# EAGLE board BluetoothMate-GiantPanel v16a (EAGLE 6.5.0), part 1 of 5
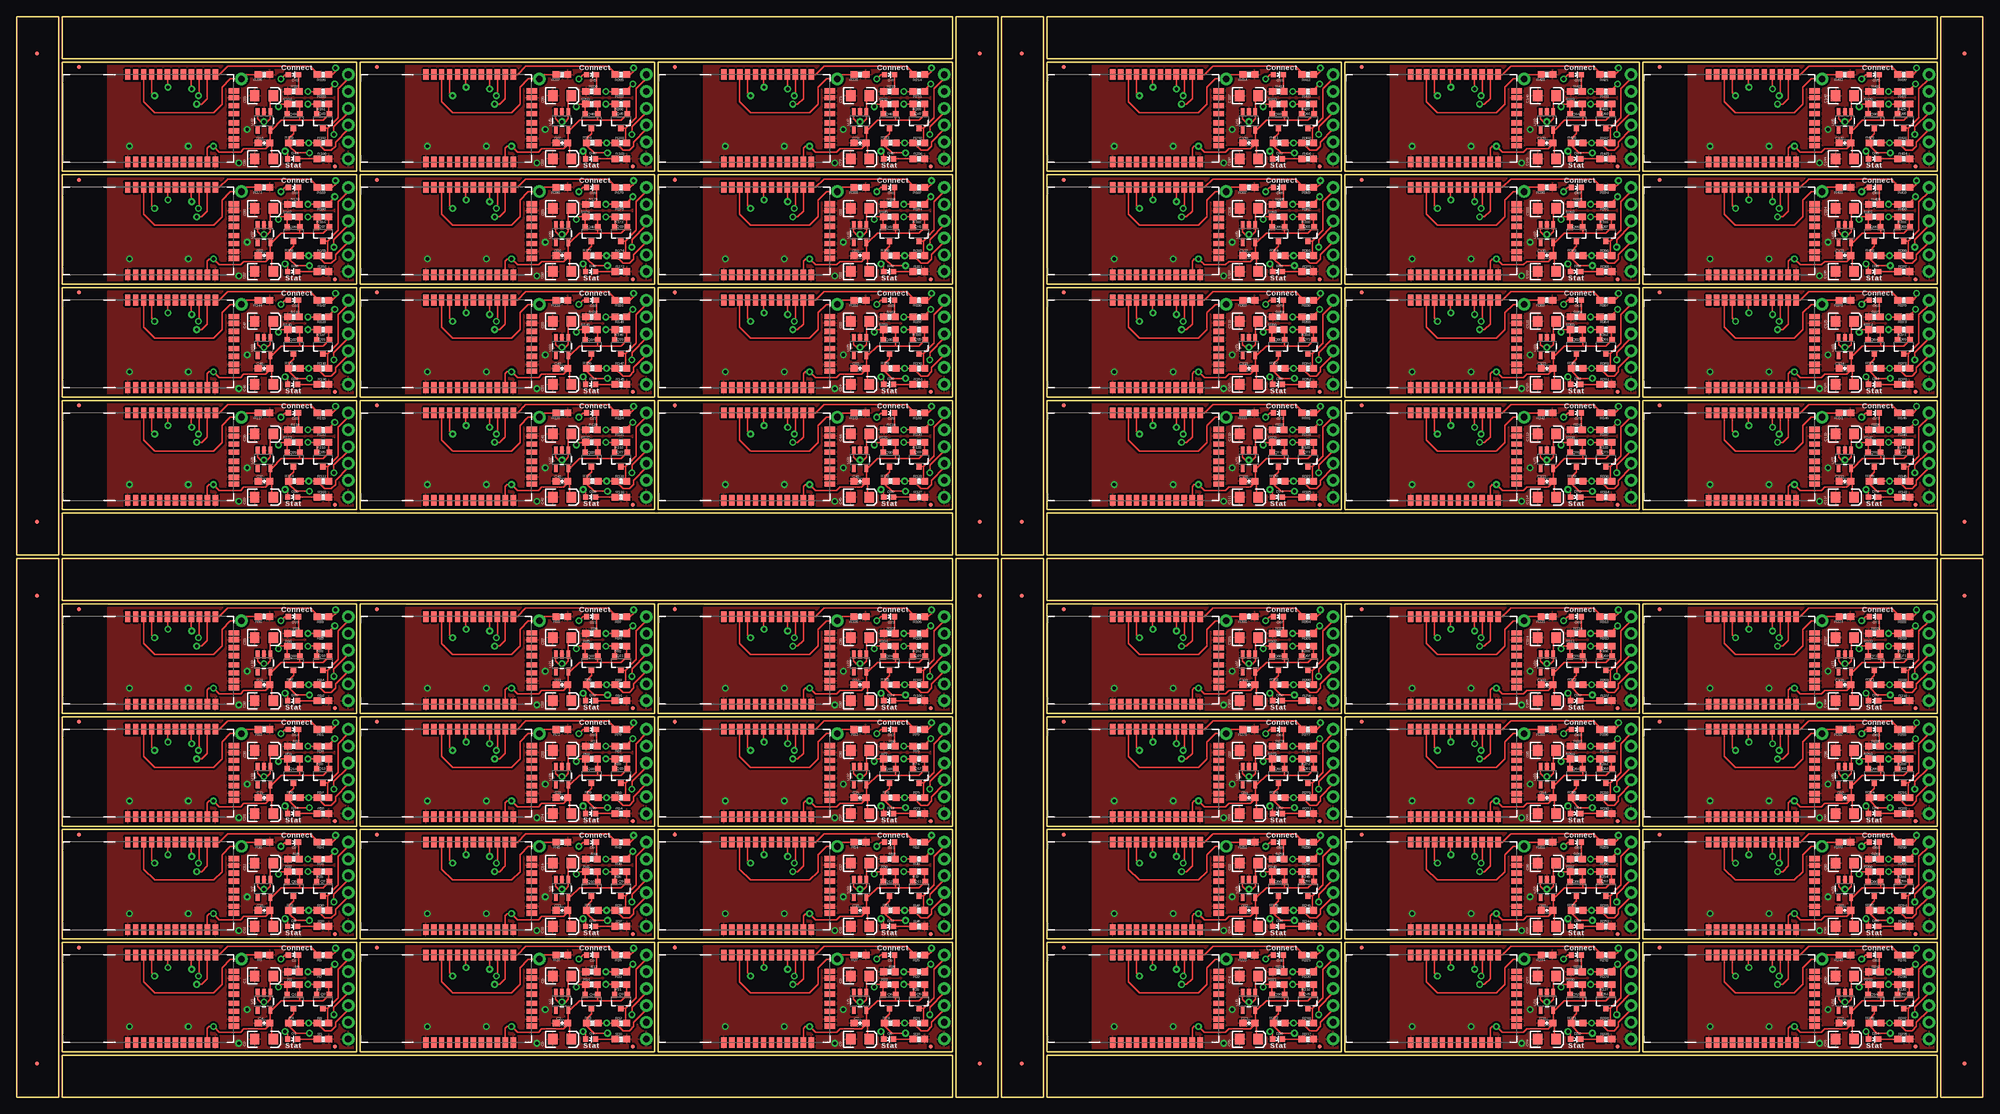
[diagram p0: board, top side]
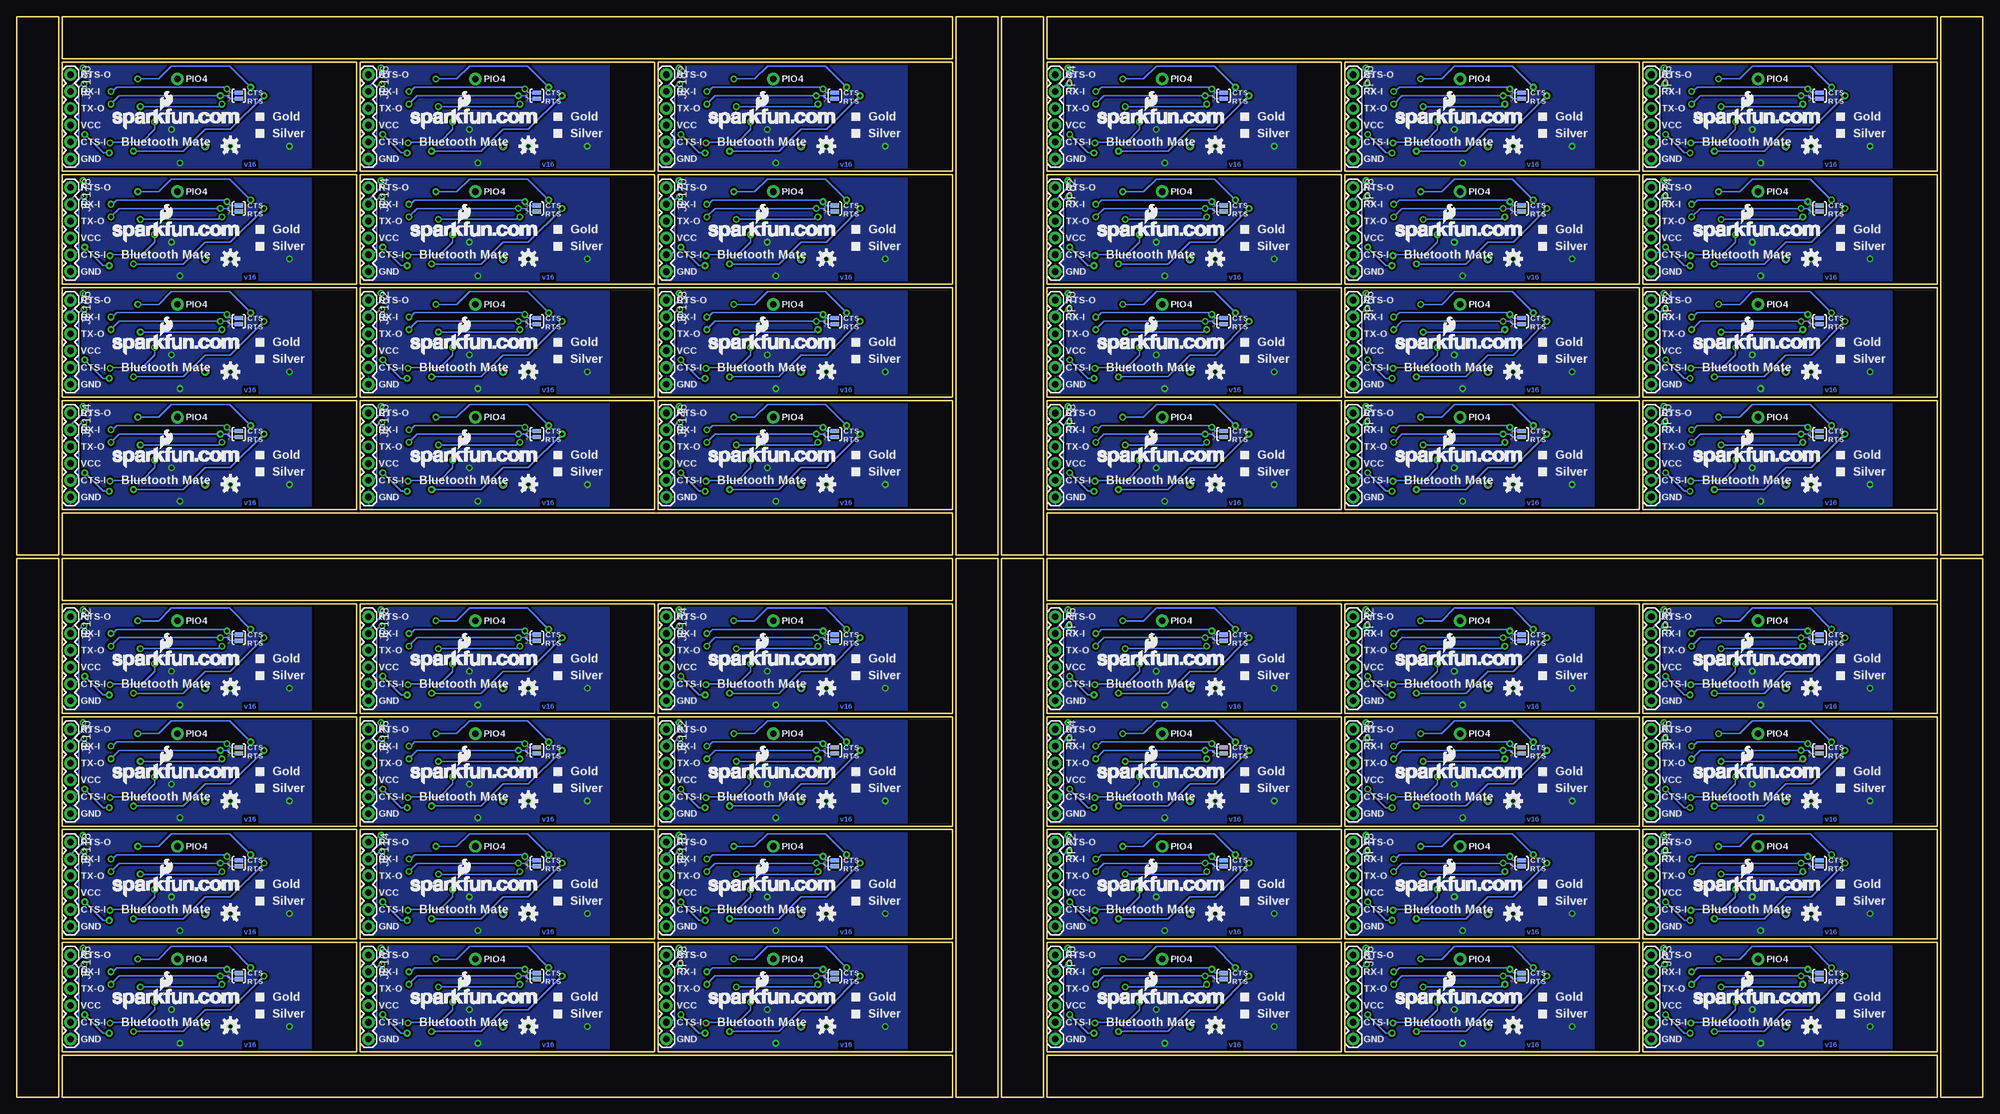
[diagram p1: board, bottom side, seen from below]

Size 296.67 x 163.07 mm. Coordinates in mm from the lower left corner, seen from the top.
Outline: 256 segments
Copper layers (1*16): Top 0.035mm / dielectric 1.5mm / Bottom 0.035mm
Design rules "SparkFun *": minimum track width 8mil, minimum drill 20mil, track to track 8mil, track to pad 8mil, pad to pad 8mil, via to via 8mil, smd to smd 8mil, copper to edge 9mil, drill to drill 8mil, minimum pad ring 12mil, minimum via ring 10mil, stop-mask expansion 4mil, vias tented up to drill 20mil, thermal gap 10mil

## Footprints (pad centres in the part's own frame; a part is rotated, then mirrored left to right if it is on the bottom)
EIA3216 = smd 1.4 x 1.6: A 1.4,0; C -1.4,0
0603-CAP = smd 1.1 x 1: 1 -0.85,0; 2 0.85,0
LED-0603 = smd 0.8 x 0.8: A 0,-0.75; C 0,0.75
MICRO-FIDUCIAL = smd 0.635 x 0.635: 1 0,0
FIDUCIAL-1X2.5 = smd 0.635 x 0.635: 1 0,0
1X01NS = drill 1.016 pad 1.88: 1 0,0
1X06 = drill 1.016 pad 1.88: 1 0,0; 2 2.54,0; 3 5.08,0; 4 7.62,0; 5 10.16,0; 6 12.7,0
SOT23-3 = smd 0.8 x 0.9: 1 -0.95,-1; 2 0.95,-1; 3 0,1.1
0603-RES = smd 1.1 x 1: 1 -0.85,0; 2 0.85,0
SJ_2S-NO = smd 0.635 x 1.27: 1 -0.45,0; 2 0.45,0
PAD.03X.05 = smd 1.27 x 1.27: P$1 0,0
RN41 = smd 0.8 x 1.6: 1 -6.6,-6.6; 2 -5.4,-6.6; 3 -4.2,-6.6; 4 -3,-6.6; 5 -1.8,-6.6; 6 -0.6,-6.6; 7 0.6,-6.6; 8 1.8,-6.6; 9 3,-6.6; 10 4.2,-6.6; 11 5.4,-6.6; 12 6.6,-6.6; 13 6.6,6.6; 14 5.4,6.6; 15 4.2,6.6; 16 3,6.6; 17 1.8,6.6; 18 0.6,6.6; 19 -0.6,6.6; 20 -1.8,6.6; 21 -3,6.6; 22 -4.2,6.6; 23 -5.4,6.6; 24 -6.6,6.6 | smd 1.6 x 0.8: 28 9.4,3.1; 29 9.4,-3.1; 30 9.4,4.122; 31 9.4,1.9; 32 9.4,0.7; 33 9.4,-0.7; 34 9.4,-1.9; 35 9.4,-4.122
SOT23-5 = smd 0.55 x 1.2: 1 -0.95,-1.3; 2 0,-1.3; 3 0.95,-1.3; 4 0.95,1.3; 5 -0.95,1.3

## Placement (x,y rotation side)
C1  10uF  [EIA3216]  37.34,18.29 0 top
C2  1uF  [0603-CAP]  82.3,11.18 180 top
C3  10uF  [EIA3216]  37.34,8.76 0 top
C4  1uF  [0603-CAP]  37.34,11.18 180 top
C5  10uF  [EIA3216]  82.3,18.29 0 top
C6  10uF  [EIA3216]  82.3,8.76 0 top
C7  1uF  [0603-CAP]  127.25,11.18 180 top
C8  10uF  [EIA3216]  127.25,18.29 0 top
C9  10uF  [EIA3216]  127.25,8.76 0 top
C10  1uF  [0603-CAP]  37.34,28.19 180 top
C11  10uF  [EIA3216]  37.34,35.31 0 top
C12  10uF  [EIA3216]  37.34,25.78 0 top
C13  1uF  [0603-CAP]  82.3,28.19 180 top
C14  10uF  [EIA3216]  82.3,35.31 0 top
C15  10uF  [EIA3216]  82.3,25.78 0 top
C16  1uF  [0603-CAP]  127.25,28.19 180 top
C17  10uF  [EIA3216]  127.25,35.31 0 top
C18  10uF  [EIA3216]  127.25,25.78 0 top
C19  1uF  [0603-CAP]  37.34,45.21 180 top
C20  10uF  [EIA3216]  37.34,52.32 0 top
C21  10uF  [EIA3216]  37.34,42.8 0 top
C22  1uF  [0603-CAP]  82.3,45.21 180 top
C23  10uF  [EIA3216]  82.3,52.32 0 top
C24  10uF  [EIA3216]  82.3,42.8 0 top
C25  1uF  [0603-CAP]  127.25,45.21 180 top
C26  10uF  [EIA3216]  127.25,52.32 0 top
C27  10uF  [EIA3216]  127.25,42.8 0 top
C28  1uF  [0603-CAP]  37.34,62.23 180 top
C29  10uF  [EIA3216]  37.34,69.34 0 top
C30  10uF  [EIA3216]  37.34,59.82 0 top
C31  1uF  [0603-CAP]  82.3,62.23 180 top
C32  10uF  [EIA3216]  82.3,69.34 0 top
C33  10uF  [EIA3216]  82.3,59.82 0 top
C34  1uF  [0603-CAP]  127.25,62.23 180 top
C35  10uF  [EIA3216]  127.25,69.34 0 top
C36  10uF  [EIA3216]  127.25,59.82 0 top
C37  1uF  [0603-CAP]  37.34,92.96 180 top
C38  10uF  [EIA3216]  37.34,100.08 0 top
C39  10uF  [EIA3216]  37.34,90.55 0 top
C40  1uF  [0603-CAP]  82.3,92.96 180 top
C41  10uF  [EIA3216]  82.3,100.08 0 top
C42  10uF  [EIA3216]  82.3,90.55 0 top
C43  1uF  [0603-CAP]  127.25,92.96 180 top
C44  10uF  [EIA3216]  127.25,100.08 0 top
C45  10uF  [EIA3216]  127.25,90.55 0 top
C46  1uF  [0603-CAP]  37.34,109.98 180 top
C47  10uF  [EIA3216]  37.34,117.09 0 top
C48  10uF  [EIA3216]  37.34,107.57 0 top
C49  1uF  [0603-CAP]  82.3,109.98 180 top
C50  10uF  [EIA3216]  82.3,117.09 0 top
C51  10uF  [EIA3216]  82.3,107.57 0 top
C52  1uF  [0603-CAP]  127.25,109.98 180 top
C53  10uF  [EIA3216]  127.25,117.09 0 top
C54  10uF  [EIA3216]  127.25,107.57 0 top
C55  1uF  [0603-CAP]  37.34,127 180 top
C56  10uF  [EIA3216]  37.34,134.11 0 top
C57  10uF  [EIA3216]  37.34,124.59 0 top
C58  1uF  [0603-CAP]  82.3,127 180 top
C59  10uF  [EIA3216]  82.3,134.11 0 top
C60  10uF  [EIA3216]  82.3,124.59 0 top
C61  1uF  [0603-CAP]  127.25,127 180 top
C62  10uF  [EIA3216]  127.25,134.11 0 top
C63  10uF  [EIA3216]  127.25,124.59 0 top
C64  1uF  [0603-CAP]  37.34,144.02 180 top
C65  10uF  [EIA3216]  37.34,151.13 0 top
C66  10uF  [EIA3216]  37.34,141.61 0 top
C67  1uF  [0603-CAP]  82.3,144.02 180 top
C68  10uF  [EIA3216]  82.3,151.13 0 top
C69  10uF  [EIA3216]  82.3,141.61 0 top
C70  1uF  [0603-CAP]  127.25,144.02 180 top
C71  10uF  [EIA3216]  127.25,151.13 0 top
C72  10uF  [EIA3216]  127.25,141.61 0 top
C73  1uF  [0603-CAP]  185.93,11.18 180 top
C74  10uF  [EIA3216]  185.93,18.29 0 top
C75  10uF  [EIA3216]  185.93,8.76 0 top
C76  1uF  [0603-CAP]  230.89,11.18 180 top
C77  10uF  [EIA3216]  230.89,18.29 0 top
C78  10uF  [EIA3216]  230.89,8.76 0 top
C79  1uF  [0603-CAP]  275.84,11.18 180 top
C80  10uF  [EIA3216]  275.84,18.29 0 top
C81  10uF  [EIA3216]  275.84,8.76 0 top
C82  1uF  [0603-CAP]  185.93,28.19 180 top
C83  10uF  [EIA3216]  185.93,35.31 0 top
C84  10uF  [EIA3216]  185.93,25.78 0 top
C85  1uF  [0603-CAP]  230.89,28.19 180 top
C86  10uF  [EIA3216]  230.89,35.31 0 top
C87  10uF  [EIA3216]  230.89,25.78 0 top
C88  1uF  [0603-CAP]  275.84,28.19 180 top
C89  10uF  [EIA3216]  275.84,35.31 0 top
C90  10uF  [EIA3216]  275.84,25.78 0 top
C91  1uF  [0603-CAP]  185.93,45.21 180 top
C92  10uF  [EIA3216]  185.93,52.32 0 top
C93  10uF  [EIA3216]  185.93,42.8 0 top
C94  1uF  [0603-CAP]  230.89,45.21 180 top
C95  10uF  [EIA3216]  230.89,52.32 0 top
C96  10uF  [EIA3216]  230.89,42.8 0 top
C97  1uF  [0603-CAP]  275.84,45.21 180 top
C98  10uF  [EIA3216]  275.84,52.32 0 top
C99  10uF  [EIA3216]  275.84,42.8 0 top
C100  1uF  [0603-CAP]  185.93,62.23 180 top
C101  10uF  [EIA3216]  185.93,69.34 0 top
C102  10uF  [EIA3216]  185.93,59.82 0 top
C103  1uF  [0603-CAP]  230.89,62.23 180 top
C104  10uF  [EIA3216]  230.89,69.34 0 top
C105  10uF  [EIA3216]  230.89,59.82 0 top
C106  1uF  [0603-CAP]  275.84,62.23 180 top
C107  10uF  [EIA3216]  275.84,69.34 0 top
C108  10uF  [EIA3216]  275.84,59.82 0 top
C109  1uF  [0603-CAP]  185.93,92.96 180 top
C110  10uF  [EIA3216]  185.93,100.08 0 top
C111  10uF  [EIA3216]  185.93,90.55 0 top
C112  1uF  [0603-CAP]  230.89,92.96 180 top
C113  10uF  [EIA3216]  230.89,100.08 0 top
C114  10uF  [EIA3216]  230.89,90.55 0 top
C115  1uF  [0603-CAP]  275.84,92.96 180 top
C116  10uF  [EIA3216]  275.84,100.08 0 top
C117  10uF  [EIA3216]  275.84,90.55 0 top
C118  1uF  [0603-CAP]  185.93,109.98 180 top
C119  10uF  [EIA3216]  185.93,117.09 0 top
C120  10uF  [EIA3216]  185.93,107.57 0 top
C121  1uF  [0603-CAP]  230.89,109.98 180 top
C122  10uF  [EIA3216]  230.89,117.09 0 top
C123  10uF  [EIA3216]  230.89,107.57 0 top
C124  1uF  [0603-CAP]  275.84,109.98 180 top
C125  10uF  [EIA3216]  275.84,117.09 0 top
C126  10uF  [EIA3216]  275.84,107.57 0 top
C127  1uF  [0603-CAP]  185.93,127 180 top
C128  10uF  [EIA3216]  185.93,134.11 0 top
C129  10uF  [EIA3216]  185.93,124.59 0 top
C130  1uF  [0603-CAP]  230.89,127 180 top
C131  10uF  [EIA3216]  230.89,134.11 0 top
C132  10uF  [EIA3216]  230.89,124.59 0 top
C133  1uF  [0603-CAP]  275.84,127 180 top
C134  10uF  [EIA3216]  275.84,134.11 0 top
C135  10uF  [EIA3216]  275.84,124.59 0 top
C136  1uF  [0603-CAP]  185.93,144.02 180 top
C137  10uF  [EIA3216]  185.93,151.13 0 top
C138  10uF  [EIA3216]  185.93,141.61 0 top
C139  1uF  [0603-CAP]  230.89,144.02 180 top
C140  10uF  [EIA3216]  230.89,151.13 0 top
C141  10uF  [EIA3216]  230.89,141.61 0 top
C142  1uF  [0603-CAP]  275.84,144.02 180 top
C143  10uF  [EIA3216]  275.84,151.13 0 top
C144  10uF  [EIA3216]  275.84,141.61 0 top
D1  Red  [LED-0603]  41.66,8.76 270 top
D2  Green  [LED-0603]  41.78,21.46 270 top
D3  Green  [LED-0603]  86.74,21.46 270 top
D4  Red  [LED-0603]  86.61,8.76 270 top
D5  Green  [LED-0603]  131.7,21.46 270 top
D6  Red  [LED-0603]  131.57,8.76 270 top
D7  Green  [LED-0603]  41.78,38.48 270 top
D8  Red  [LED-0603]  41.66,25.78 270 top
D9  Green  [LED-0603]  86.74,38.48 270 top
D10  Red  [LED-0603]  86.61,25.78 270 top
D11  Green  [LED-0603]  131.7,38.48 270 top
D12  Red  [LED-0603]  131.57,25.78 270 top
D13  Green  [LED-0603]  41.78,55.5 270 top
D14  Red  [LED-0603]  41.66,42.8 270 top
D15  Green  [LED-0603]  86.74,55.5 270 top
D16  Red  [LED-0603]  86.61,42.8 270 top
D17  Green  [LED-0603]  131.7,55.5 270 top
D18  Red  [LED-0603]  131.57,42.8 270 top
D19  Green  [LED-0603]  41.78,72.52 270 top
D20  Red  [LED-0603]  41.66,59.82 270 top
D21  Green  [LED-0603]  86.74,72.52 270 top
D22  Red  [LED-0603]  86.61,59.82 270 top
D23  Green  [LED-0603]  131.7,72.52 270 top
D24  Red  [LED-0603]  131.57,59.82 270 top
D25  Green  [LED-0603]  41.78,103.25 270 top
D26  Red  [LED-0603]  41.66,90.55 270 top
D27  Green  [LED-0603]  86.74,103.25 270 top
D28  Red  [LED-0603]  86.61,90.55 270 top
D29  Green  [LED-0603]  131.7,103.25 270 top
D30  Red  [LED-0603]  131.57,90.55 270 top
D31  Green  [LED-0603]  41.78,120.27 270 top
D32  Red  [LED-0603]  41.66,107.57 270 top
D33  Green  [LED-0603]  86.74,120.27 270 top
D34  Red  [LED-0603]  86.61,107.57 270 top
D35  Green  [LED-0603]  131.7,120.27 270 top
D36  Red  [LED-0603]  131.57,107.57 270 top
D37  Green  [LED-0603]  41.78,137.29 270 top
D38  Red  [LED-0603]  41.66,124.59 270 top
D39  Green  [LED-0603]  86.74,137.29 270 top
D40  Red  [LED-0603]  86.61,124.59 270 top
D41  Green  [LED-0603]  131.7,137.29 270 top
D42  Red  [LED-0603]  131.57,124.59 270 top
D43  Green  [LED-0603]  41.78,154.31 270 top
D44  Red  [LED-0603]  41.66,141.61 270 top
D45  Green  [LED-0603]  86.74,154.31 270 top
D46  Red  [LED-0603]  86.61,141.61 270 top
D47  Green  [LED-0603]  131.7,154.31 270 top
D48  Red  [LED-0603]  131.57,141.61 270 top
D49  Green  [LED-0603]  190.37,21.46 270 top
D50  Red  [LED-0603]  190.25,8.76 270 top
D51  Green  [LED-0603]  235.33,21.46 270 top
D52  Red  [LED-0603]  235.2,8.76 270 top
D53  Green  [LED-0603]  280.29,21.46 270 top
D54  Red  [LED-0603]  280.16,8.76 270 top
D55  Green  [LED-0603]  190.37,38.48 270 top
D56  Red  [LED-0603]  190.25,25.78 270 top
D57  Green  [LED-0603]  235.33,38.48 270 top
D58  Red  [LED-0603]  235.2,25.78 270 top
D59  Green  [LED-0603]  280.29,38.48 270 top
D60  Red  [LED-0603]  280.16,25.78 270 top
D61  Green  [LED-0603]  190.37,55.5 270 top
D62  Red  [LED-0603]  190.25,42.8 270 top
D63  Green  [LED-0603]  235.33,55.5 270 top
D64  Red  [LED-0603]  235.2,42.8 270 top
D65  Green  [LED-0603]  280.29,55.5 270 top
D66  Red  [LED-0603]  280.16,42.8 270 top
D67  Green  [LED-0603]  190.37,72.52 270 top
D68  Red  [LED-0603]  190.25,59.82 270 top
D69  Green  [LED-0603]  235.33,72.52 270 top
D70  Red  [LED-0603]  235.2,59.82 270 top
D71  Green  [LED-0603]  280.29,72.52 270 top
D72  Red  [LED-0603]  280.16,59.82 270 top
D73  Green  [LED-0603]  190.37,103.25 270 top
D74  Red  [LED-0603]  190.25,90.55 270 top
D75  Green  [LED-0603]  235.33,103.25 270 top
D76  Red  [LED-0603]  235.2,90.55 270 top
D77  Green  [LED-0603]  280.29,103.25 270 top
D78  Red  [LED-0603]  280.16,90.55 270 top
D79  Green  [LED-0603]  190.37,120.27 270 top
D80  Red  [LED-0603]  190.25,107.57 270 top
D81  Green  [LED-0603]  235.33,120.27 270 top
D82  Red  [LED-0603]  235.2,107.57 270 top
D83  Green  [LED-0603]  280.29,120.27 270 top
D84  Red  [LED-0603]  280.16,107.57 270 top
D85  Green  [LED-0603]  190.37,137.29 270 top
D86  Red  [LED-0603]  190.25,124.59 270 top
D87  Green  [LED-0603]  235.33,137.29 270 top
D88  Red  [LED-0603]  235.2,124.59 270 top
D89  Green  [LED-0603]  280.29,137.29 270 top
D90  Red  [LED-0603]  280.16,124.59 270 top
D91  Green  [LED-0603]  190.37,154.31 270 top
D92  Red  [LED-0603]  190.25,141.61 270 top
D93  Green  [LED-0603]  235.33,154.31 270 top
D94  Red  [LED-0603]  235.2,141.61 270 top
D95  Green  [LED-0603]  280.29,154.31 270 top
D96  Red  [LED-0603]  280.16,141.61 270 top
E$1  [MICRO-FIDUCIAL]  145.29,5.08 0 top
E$2  [MICRO-FIDUCIAL]  3.05,75.69 0 top
E$3  [MICRO-FIDUCIAL]  3.05,5.08 0 top
E$4  [MICRO-FIDUCIAL]  145.29,75.69 0 top
E$5  [MICRO-FIDUCIAL]  145.29,86.87 0 top
E$6  [MICRO-FIDUCIAL]  3.05,157.48 0 top
E$7  [MICRO-FIDUCIAL]  3.05,86.87 0 top
E$8  [MICRO-FIDUCIAL]  145.29,157.48 0 top
E$9  [MICRO-FIDUCIAL]  293.88,5.08 0 top
E$10  [MICRO-FIDUCIAL]  151.64,75.69 0 top
E$11  [MICRO-FIDUCIAL]  151.64,5.08 0 top
E$12  [MICRO-FIDUCIAL]  293.88,75.69 0 top
E$13  [MICRO-FIDUCIAL]  293.88,86.87 0 top
E$14  [MICRO-FIDUCIAL]  151.64,157.48 0 top
E$15  [MICRO-FIDUCIAL]  151.64,86.87 0 top
E$16  [MICRO-FIDUCIAL]  293.88,157.48 0 top
JP1  FIDUCIAL1X2.5  [FIDUCIAL-1X2.5]  9.4,22.61 0 top
JP2  M01SMDNS  [1X01NS]  33.91,20.83 0 top
JP3  [1X06]  50.04,21.46 270 bottom
JP4  FIDUCIAL1X2.5  [FIDUCIAL-1X2.5]  48.01,7.62 0 top
JP5  M01SMDNS  [1X01NS]  78.87,20.83 0 top
JP6  [1X06]  95,21.46 270 bottom
JP7  FIDUCIAL1X2.5  [FIDUCIAL-1X2.5]  54.36,22.61 0 top
JP8  FIDUCIAL1X2.5  [FIDUCIAL-1X2.5]  92.96,7.62 0 top
JP9  M01SMDNS  [1X01NS]  123.83,20.83 0 top
JP10  [1X06]  139.95,21.46 270 bottom
JP11  FIDUCIAL1X2.5  [FIDUCIAL-1X2.5]  99.31,22.61 0 top
JP12  FIDUCIAL1X2.5  [FIDUCIAL-1X2.5]  137.92,7.62 0 top
JP13  M01SMDNS  [1X01NS]  33.91,37.85 0 top
JP14  [1X06]  50.04,38.48 270 bottom
JP15  FIDUCIAL1X2.5  [FIDUCIAL-1X2.5]  9.4,39.62 0 top
JP16  FIDUCIAL1X2.5  [FIDUCIAL-1X2.5]  48.01,24.64 0 top
JP17  M01SMDNS  [1X01NS]  78.87,37.85 0 top
JP18  [1X06]  95,38.48 270 bottom
JP19  FIDUCIAL1X2.5  [FIDUCIAL-1X2.5]  54.36,39.62 0 top
JP20  FIDUCIAL1X2.5  [FIDUCIAL-1X2.5]  92.96,24.64 0 top
JP21  M01SMDNS  [1X01NS]  123.83,37.85 0 top
JP22  [1X06]  139.95,38.48 270 bottom
JP23  FIDUCIAL1X2.5  [FIDUCIAL-1X2.5]  99.31,39.62 0 top
JP24  FIDUCIAL1X2.5  [FIDUCIAL-1X2.5]  137.92,24.64 0 top
JP25  M01SMDNS  [1X01NS]  33.91,54.86 0 top
JP26  [1X06]  50.04,55.5 270 bottom
JP27  FIDUCIAL1X2.5  [FIDUCIAL-1X2.5]  9.4,56.64 0 top
JP28  FIDUCIAL1X2.5  [FIDUCIAL-1X2.5]  48.01,41.66 0 top
JP29  M01SMDNS  [1X01NS]  78.87,54.86 0 top
JP30  [1X06]  95,55.5 270 bottom
JP31  FIDUCIAL1X2.5  [FIDUCIAL-1X2.5]  54.36,56.64 0 top
JP32  FIDUCIAL1X2.5  [FIDUCIAL-1X2.5]  92.96,41.66 0 top
JP33  M01SMDNS  [1X01NS]  123.83,54.86 0 top
JP34  [1X06]  139.95,55.5 270 bottom
JP35  FIDUCIAL1X2.5  [FIDUCIAL-1X2.5]  99.31,56.64 0 top
JP36  FIDUCIAL1X2.5  [FIDUCIAL-1X2.5]  137.92,41.66 0 top
JP37  M01SMDNS  [1X01NS]  33.91,71.88 0 top
JP38  [1X06]  50.04,72.52 270 bottom
JP39  FIDUCIAL1X2.5  [FIDUCIAL-1X2.5]  9.4,73.66 0 top
JP40  FIDUCIAL1X2.5  [FIDUCIAL-1X2.5]  48.01,58.67 0 top
JP41  M01SMDNS  [1X01NS]  78.87,71.88 0 top
JP42  [1X06]  95,72.52 270 bottom
JP43  FIDUCIAL1X2.5  [FIDUCIAL-1X2.5]  54.36,73.66 0 top
JP44  FIDUCIAL1X2.5  [FIDUCIAL-1X2.5]  92.96,58.67 0 top
JP45  M01SMDNS  [1X01NS]  123.83,71.88 0 top
JP46  [1X06]  139.95,72.52 270 bottom
JP47  FIDUCIAL1X2.5  [FIDUCIAL-1X2.5]  99.31,73.66 0 top
JP48  FIDUCIAL1X2.5  [FIDUCIAL-1X2.5]  137.92,58.67 0 top
JP49  M01SMDNS  [1X01NS]  33.91,102.62 0 top
JP50  [1X06]  50.04,103.25 270 bottom
JP51  FIDUCIAL1X2.5  [FIDUCIAL-1X2.5]  9.4,104.39 0 top
JP52  FIDUCIAL1X2.5  [FIDUCIAL-1X2.5]  48.01,89.41 0 top
JP53  M01SMDNS  [1X01NS]  78.87,102.62 0 top
JP54  [1X06]  95,103.25 270 bottom
JP55  FIDUCIAL1X2.5  [FIDUCIAL-1X2.5]  54.36,104.39 0 top
JP56  FIDUCIAL1X2.5  [FIDUCIAL-1X2.5]  92.96,89.41 0 top
JP57  M01SMDNS  [1X01NS]  123.83,102.62 0 top
JP58  [1X06]  139.95,103.25 270 bottom
JP59  FIDUCIAL1X2.5  [FIDUCIAL-1X2.5]  99.31,104.39 0 top
JP60  FIDUCIAL1X2.5  [FIDUCIAL-1X2.5]  137.92,89.41 0 top
JP61  M01SMDNS  [1X01NS]  33.91,119.63 0 top
JP62  [1X06]  50.04,120.27 270 bottom
JP63  FIDUCIAL1X2.5  [FIDUCIAL-1X2.5]  9.4,121.41 0 top
JP64  FIDUCIAL1X2.5  [FIDUCIAL-1X2.5]  48.01,106.43 0 top
JP65  M01SMDNS  [1X01NS]  78.87,119.63 0 top
JP66  [1X06]  95,120.27 270 bottom
JP67  FIDUCIAL1X2.5  [FIDUCIAL-1X2.5]  54.36,121.41 0 top
JP68  FIDUCIAL1X2.5  [FIDUCIAL-1X2.5]  92.96,106.43 0 top
JP69  M01SMDNS  [1X01NS]  123.83,119.63 0 top
JP70  [1X06]  139.95,120.27 270 bottom
JP71  FIDUCIAL1X2.5  [FIDUCIAL-1X2.5]  99.31,121.41 0 top
JP72  FIDUCIAL1X2.5  [FIDUCIAL-1X2.5]  137.92,106.43 0 top
JP73  M01SMDNS  [1X01NS]  33.91,136.65 0 top
JP74  [1X06]  50.04,137.29 270 bottom
JP75  FIDUCIAL1X2.5  [FIDUCIAL-1X2.5]  9.4,138.43 0 top
JP76  FIDUCIAL1X2.5  [FIDUCIAL-1X2.5]  48.01,123.44 0 top
JP77  M01SMDNS  [1X01NS]  78.87,136.65 0 top
JP78  [1X06]  95,137.29 270 bottom
JP79  FIDUCIAL1X2.5  [FIDUCIAL-1X2.5]  54.36,138.43 0 top
JP80  FIDUCIAL1X2.5  [FIDUCIAL-1X2.5]  92.96,123.44 0 top
JP81  M01SMDNS  [1X01NS]  123.83,136.65 0 top
JP82  [1X06]  139.95,137.29 270 bottom
JP83  FIDUCIAL1X2.5  [FIDUCIAL-1X2.5]  99.31,138.43 0 top
JP84  FIDUCIAL1X2.5  [FIDUCIAL-1X2.5]  137.92,123.44 0 top
JP85  M01SMDNS  [1X01NS]  33.91,153.67 0 top
JP86  [1X06]  50.04,154.31 270 bottom
JP87  FIDUCIAL1X2.5  [FIDUCIAL-1X2.5]  9.4,155.45 0 top
JP88  FIDUCIAL1X2.5  [FIDUCIAL-1X2.5]  48.01,140.46 0 top
JP89  M01SMDNS  [1X01NS]  78.87,153.67 0 top
JP90  [1X06]  95,154.31 270 bottom
JP91  FIDUCIAL1X2.5  [FIDUCIAL-1X2.5]  54.36,155.45 0 top
JP92  FIDUCIAL1X2.5  [FIDUCIAL-1X2.5]  92.96,140.46 0 top
JP93  M01SMDNS  [1X01NS]  123.83,153.67 0 top
JP94  [1X06]  139.95,154.31 270 bottom
JP95  FIDUCIAL1X2.5  [FIDUCIAL-1X2.5]  99.31,155.45 0 top
JP96  FIDUCIAL1X2.5  [FIDUCIAL-1X2.5]  137.92,140.46 0 top
JP97  M01SMDNS  [1X01NS]  182.5,20.83 0 top
JP98  [1X06]  198.63,21.46 270 bottom
JP99  FIDUCIAL1X2.5  [FIDUCIAL-1X2.5]  157.99,22.61 0 top
JP100  FIDUCIAL1X2.5  [FIDUCIAL-1X2.5]  196.6,7.62 0 top
JP101  M01SMDNS  [1X01NS]  227.46,20.83 0 top
JP102  [1X06]  243.59,21.46 270 bottom
JP103  FIDUCIAL1X2.5  [FIDUCIAL-1X2.5]  202.95,22.61 0 top
JP104  FIDUCIAL1X2.5  [FIDUCIAL-1X2.5]  241.55,7.62 0 top
JP105  M01SMDNS  [1X01NS]  272.42,20.83 0 top
JP106  [1X06]  288.54,21.46 270 bottom
JP107  FIDUCIAL1X2.5  [FIDUCIAL-1X2.5]  247.9,22.61 0 top
JP108  FIDUCIAL1X2.5  [FIDUCIAL-1X2.5]  286.51,7.62 0 top
JP109  M01SMDNS  [1X01NS]  182.5,37.85 0 top
JP110  [1X06]  198.63,38.48 270 bottom
JP111  FIDUCIAL1X2.5  [FIDUCIAL-1X2.5]  157.99,39.62 0 top
JP112  FIDUCIAL1X2.5  [FIDUCIAL-1X2.5]  196.6,24.64 0 top
JP113  M01SMDNS  [1X01NS]  227.46,37.85 0 top
JP114  [1X06]  243.59,38.48 270 bottom
JP115  FIDUCIAL1X2.5  [FIDUCIAL-1X2.5]  202.95,39.62 0 top
JP116  FIDUCIAL1X2.5  [FIDUCIAL-1X2.5]  241.55,24.64 0 top
JP117  M01SMDNS  [1X01NS]  272.42,37.85 0 top
JP118  [1X06]  288.54,38.48 270 bottom
JP119  FIDUCIAL1X2.5  [FIDUCIAL-1X2.5]  247.9,39.62 0 top
JP120  FIDUCIAL1X2.5  [FIDUCIAL-1X2.5]  286.51,24.64 0 top
JP121  M01SMDNS  [1X01NS]  182.5,54.86 0 top
JP122  [1X06]  198.63,55.5 270 bottom
JP123  FIDUCIAL1X2.5  [FIDUCIAL-1X2.5]  157.99,56.64 0 top
JP124  FIDUCIAL1X2.5  [FIDUCIAL-1X2.5]  196.6,41.66 0 top
JP125  M01SMDNS  [1X01NS]  227.46,54.86 0 top
JP126  [1X06]  243.59,55.5 270 bottom
JP127  FIDUCIAL1X2.5  [FIDUCIAL-1X2.5]  202.95,56.64 0 top
JP128  FIDUCIAL1X2.5  [FIDUCIAL-1X2.5]  241.55,41.66 0 top
JP129  M01SMDNS  [1X01NS]  272.42,54.86 0 top
JP130  [1X06]  288.54,55.5 270 bottom
JP131  FIDUCIAL1X2.5  [FIDUCIAL-1X2.5]  247.9,56.64 0 top
JP132  FIDUCIAL1X2.5  [FIDUCIAL-1X2.5]  286.51,41.66 0 top
JP133  M01SMDNS  [1X01NS]  182.5,71.88 0 top
JP134  [1X06]  198.63,72.52 270 bottom
JP135  FIDUCIAL1X2.5  [FIDUCIAL-1X2.5]  157.99,73.66 0 top
JP136  FIDUCIAL1X2.5  [FIDUCIAL-1X2.5]  196.6,58.67 0 top
JP137  M01SMDNS  [1X01NS]  227.46,71.88 0 top
JP138  [1X06]  243.59,72.52 270 bottom
JP139  FIDUCIAL1X2.5  [FIDUCIAL-1X2.5]  202.95,73.66 0 top
JP140  FIDUCIAL1X2.5  [FIDUCIAL-1X2.5]  241.55,58.67 0 top
JP141  M01SMDNS  [1X01NS]  272.42,71.88 0 top
JP142  [1X06]  288.54,72.52 270 bottom
JP143  FIDUCIAL1X2.5  [FIDUCIAL-1X2.5]  247.9,73.66 0 top
JP144  FIDUCIAL1X2.5  [FIDUCIAL-1X2.5]  286.51,58.67 0 top
JP145  M01SMDNS  [1X01NS]  182.5,102.62 0 top
JP146  [1X06]  198.63,103.25 270 bottom
JP147  FIDUCIAL1X2.5  [FIDUCIAL-1X2.5]  157.99,104.39 0 top
JP148  FIDUCIAL1X2.5  [FIDUCIAL-1X2.5]  196.6,89.41 0 top
JP149  M01SMDNS  [1X01NS]  227.46,102.62 0 top
JP150  [1X06]  243.59,103.25 270 bottom
JP151  FIDUCIAL1X2.5  [FIDUCIAL-1X2.5]  202.95,104.39 0 top
JP152  FIDUCIAL1X2.5  [FIDUCIAL-1X2.5]  241.55,89.41 0 top
JP153  M01SMDNS  [1X01NS]  272.42,102.62 0 top
JP154  [1X06]  288.54,103.25 270 bottom
JP155  FIDUCIAL1X2.5  [FIDUCIAL-1X2.5]  247.9,104.39 0 top
JP156  FIDUCIAL1X2.5  [FIDUCIAL-1X2.5]  286.51,89.41 0 top
JP157  M01SMDNS  [1X01NS]  182.5,119.63 0 top
JP158  [1X06]  198.63,120.27 270 bottom
JP159  FIDUCIAL1X2.5  [FIDUCIAL-1X2.5]  157.99,121.41 0 top
JP160  FIDUCIAL1X2.5  [FIDUCIAL-1X2.5]  196.6,106.43 0 top
JP161  M01SMDNS  [1X01NS]  227.46,119.63 0 top
JP162  [1X06]  243.59,120.27 270 bottom
JP163  FIDUCIAL1X2.5  [FIDUCIAL-1X2.5]  202.95,121.41 0 top
JP164  FIDUCIAL1X2.5  [FIDUCIAL-1X2.5]  241.55,106.43 0 top
JP165  M01SMDNS  [1X01NS]  272.42,119.63 0 top
JP166  [1X06]  288.54,120.27 270 bottom
JP167  FIDUCIAL1X2.5  [FIDUCIAL-1X2.5]  247.9,121.41 0 top
JP168  FIDUCIAL1X2.5  [FIDUCIAL-1X2.5]  286.51,106.43 0 top
JP169  M01SMDNS  [1X01NS]  182.5,136.65 0 top
JP170  [1X06]  198.63,137.29 270 bottom
JP171  FIDUCIAL1X2.5  [FIDUCIAL-1X2.5]  157.99,138.43 0 top
JP172  FIDUCIAL1X2.5  [FIDUCIAL-1X2.5]  196.6,123.44 0 top
JP173  M01SMDNS  [1X01NS]  227.46,136.65 0 top
JP174  [1X06]  243.59,137.29 270 bottom
JP175  FIDUCIAL1X2.5  [FIDUCIAL-1X2.5]  202.95,138.43 0 top
JP176  FIDUCIAL1X2.5  [FIDUCIAL-1X2.5]  241.55,123.44 0 top
JP177  M01SMDNS  [1X01NS]  272.42,136.65 0 top
JP178  [1X06]  288.54,137.29 270 bottom
JP179  FIDUCIAL1X2.5  [FIDUCIAL-1X2.5]  247.9,138.43 0 top
JP180  FIDUCIAL1X2.5  [FIDUCIAL-1X2.5]  286.51,123.44 0 top
JP181  M01SMDNS  [1X01NS]  182.5,153.67 0 top
JP182  [1X06]  198.63,154.31 270 bottom
JP183  FIDUCIAL1X2.5  [FIDUCIAL-1X2.5]  157.99,155.45 0 top
JP184  FIDUCIAL1X2.5  [FIDUCIAL-1X2.5]  196.6,140.46 0 top
JP185  M01SMDNS  [1X01NS]  227.46,153.67 0 top
JP186  [1X06]  243.59,154.31 270 bottom
JP187  FIDUCIAL1X2.5  [FIDUCIAL-1X2.5]  202.95,155.45 0 top
JP188  FIDUCIAL1X2.5  [FIDUCIAL-1X2.5]  241.55,140.46 0 top
JP189  M01SMDNS  [1X01NS]  272.42,153.67 0 top
JP190  [1X06]  288.54,154.31 270 bottom
JP191  FIDUCIAL1X2.5  [FIDUCIAL-1X2.5]  247.9,155.45 0 top
JP192  FIDUCIAL1X2.5  [FIDUCIAL-1X2.5]  286.51,140.46 0 top
LOGO1  OSHW-LOGOS  [OSHW-LOGO-S]  25.91,10.67 0 bottom
LOGO2  OSHW-LOGOS  [OSHW-LOGO-S]  70.87,10.67 0 bottom
LOGO3  OSHW-LOGOS  [OSHW-LOGO-S]  115.82,10.67 0 bottom
LOGO4  OSHW-LOGOS  [OSHW-LOGO-S]  25.91,27.69 0 bottom
LOGO5  OSHW-LOGOS  [OSHW-LOGO-S]  70.87,27.69 0 bottom
LOGO6  OSHW-LOGOS  [OSHW-LOGO-S]  115.82,27.69 0 bottom
LOGO7  OSHW-LOGOS  [OSHW-LOGO-S]  25.91,44.7 0 bottom
LOGO8  OSHW-LOGOS  [OSHW-LOGO-S]  70.87,44.7 0 bottom
LOGO9  OSHW-LOGOS  [OSHW-LOGO-S]  115.82,44.7 0 bottom
LOGO10  OSHW-LOGOS  [OSHW-LOGO-S]  25.91,61.72 0 bottom
LOGO11  OSHW-LOGOS  [OSHW-LOGO-S]  70.87,61.72 0 bottom
LOGO12  OSHW-LOGOS  [OSHW-LOGO-S]  115.82,61.72 0 bottom
LOGO13  OSHW-LOGOS  [OSHW-LOGO-S]  25.91,92.46 0 bottom
LOGO14  OSHW-LOGOS  [OSHW-LOGO-S]  70.87,92.46 0 bottom
LOGO15  OSHW-LOGOS  [OSHW-LOGO-S]  115.82,92.46 0 bottom
LOGO16  OSHW-LOGOS  [OSHW-LOGO-S]  25.91,109.47 0 bottom
LOGO17  OSHW-LOGOS  [OSHW-LOGO-S]  70.87,109.47 0 bottom
LOGO18  OSHW-LOGOS  [OSHW-LOGO-S]  115.82,109.47 0 bottom
LOGO19  OSHW-LOGOS  [OSHW-LOGO-S]  25.91,126.49 0 bottom
LOGO20  OSHW-LOGOS  [OSHW-LOGO-S]  70.87,126.49 0 bottom
LOGO21  OSHW-LOGOS  [OSHW-LOGO-S]  115.82,126.49 0 bottom
LOGO22  OSHW-LOGOS  [OSHW-LOGO-S]  25.91,143.51 0 bottom
LOGO23  OSHW-LOGOS  [OSHW-LOGO-S]  70.87,143.51 0 bottom
LOGO24  OSHW-LOGOS  [OSHW-LOGO-S]  115.82,143.51 0 bottom
LOGO25  OSHW-LOGOS  [OSHW-LOGO-S]  174.5,10.67 0 bottom
LOGO26  OSHW-LOGOS  [OSHW-LOGO-S]  219.46,10.67 0 bottom
LOGO27  OSHW-LOGOS  [OSHW-LOGO-S]  264.41,10.67 0 bottom
LOGO28  OSHW-LOGOS  [OSHW-LOGO-S]  174.5,27.69 0 bottom
LOGO29  OSHW-LOGOS  [OSHW-LOGO-S]  219.46,27.69 0 bottom
LOGO30  OSHW-LOGOS  [OSHW-LOGO-S]  264.41,27.69 0 bottom
LOGO31  OSHW-LOGOS  [OSHW-LOGO-S]  174.5,44.7 0 bottom
LOGO32  OSHW-LOGOS  [OSHW-LOGO-S]  219.46,44.7 0 bottom
LOGO33  OSHW-LOGOS  [OSHW-LOGO-S]  264.41,44.7 0 bottom
LOGO34  OSHW-LOGOS  [OSHW-LOGO-S]  174.5,61.72 0 bottom
LOGO35  OSHW-LOGOS  [OSHW-LOGO-S]  219.46,61.72 0 bottom
LOGO36  OSHW-LOGOS  [OSHW-LOGO-S]  264.41,61.72 0 bottom
LOGO37  OSHW-LOGOS  [OSHW-LOGO-S]  174.5,92.46 0 bottom
LOGO38  OSHW-LOGOS  [OSHW-LOGO-S]  219.46,92.46 0 bottom
LOGO39  OSHW-LOGOS  [OSHW-LOGO-S]  264.41,92.46 0 bottom
LOGO40  OSHW-LOGOS  [OSHW-LOGO-S]  174.5,109.47 0 bottom
LOGO41  OSHW-LOGOS  [OSHW-LOGO-S]  219.46,109.47 0 bottom
LOGO42  OSHW-LOGOS  [OSHW-LOGO-S]  264.41,109.47 0 bottom
LOGO43  OSHW-LOGOS  [OSHW-LOGO-S]  174.5,126.49 0 bottom
LOGO44  OSHW-LOGOS  [OSHW-LOGO-S]  219.46,126.49 0 bottom
LOGO45  OSHW-LOGOS  [OSHW-LOGO-S]  264.41,126.49 0 bottom
LOGO46  OSHW-LOGOS  [OSHW-LOGO-S]  174.5,143.51 0 bottom
LOGO47  OSHW-LOGOS  [OSHW-LOGO-S]  219.46,143.51 0 bottom
LOGO48  OSHW-LOGOS  [OSHW-LOGO-S]  264.41,143.51 0 bottom
Q1  MOSFET-NCHANNELSMD  [SOT23-3]  41.78,14.48 180 top
Q2  MOSFET-NCHANNELSMD  [SOT23-3]  46.23,14.48 180 top
Q3  MOSFET-NCHANNELSMD  [SOT23-3]  91.19,14.48 180 top
Q4  MOSFET-NCHANNELSMD  [SOT23-3]  86.74,14.48 180 top
Q5  MOSFET-NCHANNELSMD  [SOT23-3]  136.14,14.48 180 top
Q6  MOSFET-NCHANNELSMD  [SOT23-3]  131.7,14.48 180 top
Q7  MOSFET-NCHANNELSMD  [SOT23-3]  46.23,31.5 180 top
Q8  MOSFET-NCHANNELSMD  [SOT23-3]  41.78,31.5 180 top
Q9  MOSFET-NCHANNELSMD  [SOT23-3]  91.19,31.5 180 top
Q10  MOSFET-NCHANNELSMD  [SOT23-3]  86.74,31.5 180 top
Q11  MOSFET-NCHANNELSMD  [SOT23-3]  136.14,31.5 180 top
Q12  MOSFET-NCHANNELSMD  [SOT23-3]  131.7,31.5 180 top
Q13  MOSFET-NCHANNELSMD  [SOT23-3]  46.23,48.51 180 top
Q14  MOSFET-NCHANNELSMD  [SOT23-3]  41.78,48.51 180 top
Q15  MOSFET-NCHANNELSMD  [SOT23-3]  91.19,48.51 180 top
Q16  MOSFET-NCHANNELSMD  [SOT23-3]  86.74,48.51 180 top
Q17  MOSFET-NCHANNELSMD  [SOT23-3]  136.14,48.51 180 top
Q18  MOSFET-NCHANNELSMD  [SOT23-3]  131.7,48.51 180 top
Q19  MOSFET-NCHANNELSMD  [SOT23-3]  46.23,65.53 180 top
Q20  MOSFET-NCHANNELSMD  [SOT23-3]  41.78,65.53 180 top
Q21  MOSFET-NCHANNELSMD  [SOT23-3]  91.19,65.53 180 top
Q22  MOSFET-NCHANNELSMD  [SOT23-3]  86.74,65.53 180 top
Q23  MOSFET-NCHANNELSMD  [SOT23-3]  136.14,65.53 180 top
Q24  MOSFET-NCHANNELSMD  [SOT23-3]  131.7,65.53 180 top
Q25  MOSFET-NCHANNELSMD  [SOT23-3]  46.23,96.27 180 top
Q26  MOSFET-NCHANNELSMD  [SOT23-3]  41.78,96.27 180 top
Q27  MOSFET-NCHANNELSMD  [SOT23-3]  91.19,96.27 180 top
Q28  MOSFET-NCHANNELSMD  [SOT23-3]  86.74,96.27 180 top
Q29  MOSFET-NCHANNELSMD  [SOT23-3]  136.14,96.27 180 top
Q30  MOSFET-NCHANNELSMD  [SOT23-3]  131.7,96.27 180 top
Q31  MOSFET-NCHANNELSMD  [SOT23-3]  46.23,113.28 180 top
Q32  MOSFET-NCHANNELSMD  [SOT23-3]  41.78,113.28 180 top
Q33  MOSFET-NCHANNELSMD  [SOT23-3]  91.19,113.28 180 top
Q34  MOSFET-NCHANNELSMD  [SOT23-3]  86.74,113.28 180 top
Q35  MOSFET-NCHANNELSMD  [SOT23-3]  136.14,113.28 180 top
Q36  MOSFET-NCHANNELSMD  [SOT23-3]  131.7,113.28 180 top
Q37  MOSFET-NCHANNELSMD  [SOT23-3]  46.23,130.3 180 top
Q38  MOSFET-NCHANNELSMD  [SOT23-3]  41.78,130.3 180 top
Q39  MOSFET-NCHANNELSMD  [SOT23-3]  91.19,130.3 180 top
Q40  MOSFET-NCHANNELSMD  [SOT23-3]  86.74,130.3 180 top
Q41  MOSFET-NCHANNELSMD  [SOT23-3]  136.14,130.3 180 top
Q42  MOSFET-NCHANNELSMD  [SOT23-3]  131.7,130.3 180 top
Q43  MOSFET-NCHANNELSMD  [SOT23-3]  46.23,147.32 180 top
Q44  MOSFET-NCHANNELSMD  [SOT23-3]  41.78,147.32 180 top
Q45  MOSFET-NCHANNELSMD  [SOT23-3]  91.19,147.32 180 top
Q46  MOSFET-NCHANNELSMD  [SOT23-3]  86.74,147.32 180 top
Q47  MOSFET-NCHANNELSMD  [SOT23-3]  136.14,147.32 180 top
Q48  MOSFET-NCHANNELSMD  [SOT23-3]  131.7,147.32 180 top
Q49  MOSFET-NCHANNELSMD  [SOT23-3]  194.82,14.48 180 top
Q50  MOSFET-NCHANNELSMD  [SOT23-3]  190.37,14.48 180 top
Q51  MOSFET-NCHANNELSMD  [SOT23-3]  239.78,14.48 180 top
Q52  MOSFET-NCHANNELSMD  [SOT23-3]  235.33,14.48 180 top
Q53  MOSFET-NCHANNELSMD  [SOT23-3]  284.73,14.48 180 top
Q54  MOSFET-NCHANNELSMD  [SOT23-3]  280.29,14.48 180 top
Q55  MOSFET-NCHANNELSMD  [SOT23-3]  194.82,31.5 180 top
Q56  MOSFET-NCHANNELSMD  [SOT23-3]  190.37,31.5 180 top
Q57  MOSFET-NCHANNELSMD  [SOT23-3]  239.78,31.5 180 top
Q58  MOSFET-NCHANNELSMD  [SOT23-3]  235.33,31.5 180 top
Q59  MOSFET-NCHANNELSMD  [SOT23-3]  284.73,31.5 180 top
Q60  MOSFET-NCHANNELSMD  [SOT23-3]  280.29,31.5 180 top
Q61  MOSFET-NCHANNELSMD  [SOT23-3]  194.82,48.51 180 top
Q62  MOSFET-NCHANNELSMD  [SOT23-3]  190.37,48.51 180 top
Q63  MOSFET-NCHANNELSMD  [SOT23-3]  239.78,48.51 180 top
Q64  MOSFET-NCHANNELSMD  [SOT23-3]  235.33,48.51 180 top
Q65  MOSFET-NCHANNELSMD  [SOT23-3]  284.73,48.51 180 top
Q66  MOSFET-NCHANNELSMD  [SOT23-3]  280.29,48.51 180 top
Q67  MOSFET-NCHANNELSMD  [SOT23-3]  194.82,65.53 180 top
Q68  MOSFET-NCHANNELSMD  [SOT23-3]  190.37,65.53 180 top
Q69  MOSFET-NCHANNELSMD  [SOT23-3]  239.78,65.53 180 top
Q70  MOSFET-NCHANNELSMD  [SOT23-3]  235.33,65.53 180 top
Q71  MOSFET-NCHANNELSMD  [SOT23-3]  284.73,65.53 180 top
Q72  MOSFET-NCHANNELSMD  [SOT23-3]  280.29,65.53 180 top
Q73  MOSFET-NCHANNELSMD  [SOT23-3]  194.82,96.27 180 top
Q74  MOSFET-NCHANNELSMD  [SOT23-3]  190.37,96.27 180 top
Q75  MOSFET-NCHANNELSMD  [SOT23-3]  239.78,96.27 180 top
Q76  MOSFET-NCHANNELSMD  [SOT23-3]  235.33,96.27 180 top
Q77  MOSFET-NCHANNELSMD  [SOT23-3]  284.73,96.27 180 top
Q78  MOSFET-NCHANNELSMD  [SOT23-3]  280.29,96.27 180 top
Q79  MOSFET-NCHANNELSMD  [SOT23-3]  194.82,113.28 180 top
Q80  MOSFET-NCHANNELSMD  [SOT23-3]  190.37,113.28 180 top
Q81  MOSFET-NCHANNELSMD  [SOT23-3]  239.78,113.28 180 top
Q82  MOSFET-NCHANNELSMD  [SOT23-3]  235.33,113.28 180 top
Q83  MOSFET-NCHANNELSMD  [SOT23-3]  284.73,113.28 180 top
Q84  MOSFET-NCHANNELSMD  [SOT23-3]  280.29,113.28 180 top
Q85  MOSFET-NCHANNELSMD  [SOT23-3]  194.82,130.3 180 top
Q86  MOSFET-NCHANNELSMD  [SOT23-3]  190.37,130.3 180 top
Q87  MOSFET-NCHANNELSMD  [SOT23-3]  239.78,130.3 180 top
Q88  MOSFET-NCHANNELSMD  [SOT23-3]  235.33,130.3 180 top
Q89  MOSFET-NCHANNELSMD  [SOT23-3]  284.73,130.3 180 top
Q90  MOSFET-NCHANNELSMD  [SOT23-3]  280.29,130.3 180 top
Q91  MOSFET-NCHANNELSMD  [SOT23-3]  194.82,147.32 180 top
Q92  MOSFET-NCHANNELSMD  [SOT23-3]  190.37,147.32 180 top
Q93  MOSFET-NCHANNELSMD  [SOT23-3]  239.78,147.32 180 top
Q94  MOSFET-NCHANNELSMD  [SOT23-3]  235.33,147.32 180 top
Q95  MOSFET-NCHANNELSMD  [SOT23-3]  284.73,147.32 180 top
Q96  MOSFET-NCHANNELSMD  [SOT23-3]  280.29,147.32 180 top
R1  330  [0603-RES]  46.23,8.76 0 top
R2  10K  [0603-RES]  46.23,18.92 0 top
R3  10K  [0603-RES]  41.78,17.02 180 top
R4  10K  [0603-RES]  41.91,11.18 180 top
R5  10K  [0603-RES]  46.23,21.46 0 top
R6  330  [0603-RES]  41.78,18.92 180 top
R7  10K  [0603-RES]  46.23,17.02 180 top
R8  10K  [0603-RES]  46.23,11.18 0 top
R9  10K  [0603-RES]  37.34,21.46 180 top
R10  330  [0603-RES]  91.19,8.76 0 top
R11  10K  [0603-RES]  91.19,17.02 180 top
R12  10K  [0603-RES]  91.19,11.18 0 top
R13  10K  [0603-RES]  91.19,18.92 0 top
R14  10K  [0603-RES]  86.74,17.02 180 top
R15  10K  [0603-RES]  86.87,11.18 180 top
R16  10K  [0603-RES]  91.19,21.46 0 top
R17  330  [0603-RES]  86.74,18.92 180 top
R18  10K  [0603-RES]  82.3,21.46 180 top
R19  330  [0603-RES]  136.14,8.76 0 top
R20  10K  [0603-RES]  136.14,17.02 180 top
R21  10K  [0603-RES]  136.14,11.18 0 top
R22  10K  [0603-RES]  136.14,18.92 0 top
R23  10K  [0603-RES]  131.7,17.02 180 top
R24  10K  [0603-RES]  131.83,11.18 180 top
R25  10K  [0603-RES]  136.14,21.46 0 top
R26  330  [0603-RES]  131.7,18.92 180 top
R27  10K  [0603-RES]  127.25,21.46 180 top
R28  330  [0603-RES]  46.23,25.78 0 top
R29  10K  [0603-RES]  46.23,34.04 180 top
R30  10K  [0603-RES]  46.23,28.19 0 top
R31  10K  [0603-RES]  46.23,35.94 0 top
R32  10K  [0603-RES]  41.78,34.04 180 top
R33  10K  [0603-RES]  41.91,28.19 180 top
R34  10K  [0603-RES]  46.23,38.48 0 top
R35  330  [0603-RES]  41.78,35.94 180 top
R36  10K  [0603-RES]  37.34,38.48 180 top
R37  330  [0603-RES]  91.19,25.78 0 top
R38  10K  [0603-RES]  91.19,34.04 180 top
R39  10K  [0603-RES]  91.19,28.19 0 top
R40  10K  [0603-RES]  91.19,35.94 0 top
R41  10K  [0603-RES]  86.74,34.04 180 top
R42  10K  [0603-RES]  86.87,28.19 180 top
R43  10K  [0603-RES]  91.19,38.48 0 top
R44  330  [0603-RES]  86.74,35.94 180 top
R45  10K  [0603-RES]  82.3,38.48 180 top
R46  330  [0603-RES]  136.14,25.78 0 top
R47  10K  [0603-RES]  136.14,34.04 180 top
R48  10K  [0603-RES]  136.14,28.19 0 top
R49  10K  [0603-RES]  136.14,35.94 0 top
R50  10K  [0603-RES]  131.7,34.04 180 top
R51  10K  [0603-RES]  131.83,28.19 180 top
R52  10K  [0603-RES]  136.14,38.48 0 top
R53  330  [0603-RES]  131.7,35.94 180 top
R54  10K  [0603-RES]  127.25,38.48 180 top
R55  330  [0603-RES]  46.23,42.8 0 top
R56  10K  [0603-RES]  46.23,51.05 180 top
R57  10K  [0603-RES]  46.23,45.21 0 top
R58  10K  [0603-RES]  46.23,52.96 0 top
R59  10K  [0603-RES]  41.78,51.05 180 top
R60  10K  [0603-RES]  41.91,45.21 180 top
R61  10K  [0603-RES]  46.23,55.5 0 top
R62  330  [0603-RES]  41.78,52.96 180 top
R63  10K  [0603-RES]  37.34,55.5 180 top
R64  330  [0603-RES]  91.19,42.8 0 top
R65  10K  [0603-RES]  91.19,51.05 180 top
R66  10K  [0603-RES]  91.19,45.21 0 top
R67  10K  [0603-RES]  91.19,52.96 0 top
R68  10K  [0603-RES]  86.74,51.05 180 top
R69  10K  [0603-RES]  86.87,45.21 180 top
R70  10K  [0603-RES]  91.19,55.5 0 top
R71  330  [0603-RES]  86.74,52.96 180 top
R72  10K  [0603-RES]  82.3,55.5 180 top
R73  330  [0603-RES]  136.14,42.8 0 top
R74  10K  [0603-RES]  136.14,51.05 180 top
R75  10K  [0603-RES]  136.14,45.21 0 top
R76  10K  [0603-RES]  136.14,52.96 0 top
R77  10K  [0603-RES]  131.7,51.05 180 top
R78  10K  [0603-RES]  131.83,45.21 180 top
R79  10K  [0603-RES]  136.14,55.5 0 top
R80  330  [0603-RES]  131.7,52.96 180 top
R81  10K  [0603-RES]  127.25,55.5 180 top
R82  330  [0603-RES]  46.23,59.82 0 top
R83  10K  [0603-RES]  46.23,68.07 180 top
R84  10K  [0603-RES]  46.23,62.23 0 top
R85  10K  [0603-RES]  46.23,69.98 0 top
R86  10K  [0603-RES]  41.78,68.07 180 top
R87  10K  [0603-RES]  41.91,62.23 180 top
R88  10K  [0603-RES]  46.23,72.52 0 top
R89  330  [0603-RES]  41.78,69.98 180 top
R90  10K  [0603-RES]  37.34,72.52 180 top
R91  330  [0603-RES]  91.19,59.82 0 top
R92  10K  [0603-RES]  91.19,68.07 180 top
R93  10K  [0603-RES]  91.19,62.23 0 top
R94  10K  [0603-RES]  91.19,69.98 0 top
R95  10K  [0603-RES]  86.74,68.07 180 top
R96  10K  [0603-RES]  86.87,62.23 180 top
R97  10K  [0603-RES]  91.19,72.52 0 top
R98  330  [0603-RES]  86.74,69.98 180 top
R99  10K  [0603-RES]  82.3,72.52 180 top
R100  330  [0603-RES]  136.14,59.82 0 top
R101  10K  [0603-RES]  136.14,68.07 180 top
R102  10K  [0603-RES]  136.14,62.23 0 top
R103  10K  [0603-RES]  136.14,69.98 0 top
R104  10K  [0603-RES]  131.7,68.07 180 top
R105  10K  [0603-RES]  131.83,62.23 180 top
R106  10K  [0603-RES]  136.14,72.52 0 top
R107  330  [0603-RES]  131.7,69.98 180 top
R108  10K  [0603-RES]  127.25,72.52 180 top
R109  330  [0603-RES]  46.23,90.55 0 top
R110  10K  [0603-RES]  46.23,98.81 180 top
R111  10K  [0603-RES]  46.23,92.96 0 top
R112  10K  [0603-RES]  46.23,100.71 0 top
R113  10K  [0603-RES]  41.78,98.81 180 top
R114  10K  [0603-RES]  41.91,92.96 180 top
R115  10K  [0603-RES]  46.23,103.25 0 top
R116  330  [0603-RES]  41.78,100.71 180 top
R117  10K  [0603-RES]  37.34,103.25 180 top
R118  330  [0603-RES]  91.19,90.55 0 top
R119  10K  [0603-RES]  91.19,98.81 180 top
R120  10K  [0603-RES]  91.19,92.96 0 top
R121  10K  [0603-RES]  91.19,100.71 0 top
R122  10K  [0603-RES]  86.74,98.81 180 top
R123  10K  [0603-RES]  86.87,92.96 180 top
R124  10K  [0603-RES]  91.19,103.25 0 top
R125  330  [0603-RES]  86.74,100.71 180 top
R126  10K  [0603-RES]  82.3,103.25 180 top
R127  330  [0603-RES]  136.14,90.55 0 top
R128  10K  [0603-RES]  136.14,98.81 180 top
R129  10K  [0603-RES]  136.14,92.96 0 top
R130  10K  [0603-RES]  136.14,100.71 0 top
R131  10K  [0603-RES]  131.7,98.81 180 top
R132  10K  [0603-RES]  131.83,92.96 180 top
R133  10K  [0603-RES]  136.14,103.25 0 top
R134  330  [0603-RES]  131.7,100.71 180 top
R135  10K  [0603-RES]  127.25,103.25 180 top
R136  330  [0603-RES]  46.23,107.57 0 top
R137  10K  [0603-RES]  46.23,115.82 180 top
R138  10K  [0603-RES]  46.23,109.98 0 top
R139  10K  [0603-RES]  46.23,117.73 0 top
R140  10K  [0603-RES]  41.78,115.82 180 top
R141  10K  [0603-RES]  41.91,109.98 180 top
R142  10K  [0603-RES]  46.23,120.27 0 top
R143  330  [0603-RES]  41.78,117.73 180 top
R144  10K  [0603-RES]  37.34,120.27 180 top
R145  330  [0603-RES]  91.19,107.57 0 top
R146  10K  [0603-RES]  91.19,115.82 180 top
R147  10K  [0603-RES]  91.19,109.98 0 top
R148  10K  [0603-RES]  91.19,117.73 0 top
R149  10K  [0603-RES]  86.74,115.82 180 top
R150  10K  [0603-RES]  86.87,109.98 180 top
R151  10K  [0603-RES]  91.19,120.27 0 top
R152  330  [0603-RES]  86.74,117.73 180 top
R153  10K  [0603-RES]  82.3,120.27 180 top
R154  330  [0603-RES]  136.14,107.57 0 top
R155  10K  [0603-RES]  136.14,115.82 180 top
R156  10K  [0603-RES]  136.14,109.98 0 top
R157  10K  [0603-RES]  136.14,117.73 0 top
R158  10K  [0603-RES]  131.7,115.82 180 top
R159  10K  [0603-RES]  131.83,109.98 180 top
R160  10K  [0603-RES]  136.14,120.27 0 top
R161  330  [0603-RES]  131.7,117.73 180 top
R162  10K  [0603-RES]  127.25,120.27 180 top
R163  330  [0603-RES]  46.23,124.59 0 top
R164  10K  [0603-RES]  46.23,132.84 180 top
R165  10K  [0603-RES]  46.23,127 0 top
R166  10K  [0603-RES]  46.23,134.75 0 top
R167  10K  [0603-RES]  41.78,132.84 180 top
R168  10K  [0603-RES]  41.91,127 180 top
R169  10K  [0603-RES]  46.23,137.29 0 top
R170  330  [0603-RES]  41.78,134.75 180 top
R171  10K  [0603-RES]  37.34,137.29 180 top
R172  330  [0603-RES]  91.19,124.59 0 top
R173  10K  [0603-RES]  91.19,132.84 180 top
R174  10K  [0603-RES]  91.19,127 0 top
R175  10K  [0603-RES]  91.19,134.75 0 top
R176  10K  [0603-RES]  86.74,132.84 180 top
R177  10K  [0603-RES]  86.87,127 180 top
R178  10K  [0603-RES]  91.19,137.29 0 top
R179  330  [0603-RES]  86.74,134.75 180 top
R180  10K  [0603-RES]  82.3,137.29 180 top
R181  330  [0603-RES]  136.14,124.59 0 top
R182  10K  [0603-RES]  136.14,132.84 180 top
R183  10K  [0603-RES]  136.14,127 0 top
R184  10K  [0603-RES]  136.14,134.75 0 top
R185  10K  [0603-RES]  131.7,132.84 180 top
R186  10K  [0603-RES]  131.83,127 180 top
R187  10K  [0603-RES]  136.14,137.29 0 top
R188  330  [0603-RES]  131.7,134.75 180 top
R189  10K  [0603-RES]  127.25,137.29 180 top
R190  330  [0603-RES]  46.23,141.61 0 top
R191  10K  [0603-RES]  46.23,149.86 180 top
R192  10K  [0603-RES]  46.23,144.02 0 top
R193  10K  [0603-RES]  46.23,151.77 0 top
R194  10K  [0603-RES]  41.78,149.86 180 top
R195  10K  [0603-RES]  41.91,144.02 180 top
R196  10K  [0603-RES]  46.23,154.31 0 top
R197  330  [0603-RES]  41.78,151.77 180 top
R198  10K  [0603-RES]  37.34,154.31 180 top
R199  330  [0603-RES]  91.19,141.61 0 top
R200  10K  [0603-RES]  91.19,149.86 180 top
R201  10K  [0603-RES]  91.19,144.02 0 top
R202  10K  [0603-RES]  91.19,151.77 0 top
R203  10K  [0603-RES]  86.74,149.86 180 top
R204  10K  [0603-RES]  86.87,144.02 180 top
R205  10K  [0603-RES]  91.19,154.31 0 top
R206  330  [0603-RES]  86.74,151.77 180 top
R207  10K  [0603-RES]  82.3,154.31 180 top
R208  330  [0603-RES]  136.14,141.61 0 top
R209  10K  [0603-RES]  136.14,149.86 180 top
R210  10K  [0603-RES]  136.14,144.02 0 top
R211  10K  [0603-RES]  136.14,151.77 0 top
R212  10K  [0603-RES]  131.7,149.86 180 top
R213  10K  [0603-RES]  131.83,144.02 180 top
R214  10K  [0603-RES]  136.14,154.31 0 top
R215  330  [0603-RES]  131.7,151.77 180 top
R216  10K  [0603-RES]  127.25,154.31 180 top
R217  330  [0603-RES]  194.82,8.76 0 top
R218  10K  [0603-RES]  194.82,17.02 180 top
R219  10K  [0603-RES]  194.82,11.18 0 top
R220  10K  [0603-RES]  194.82,18.92 0 top
R221  10K  [0603-RES]  190.37,17.02 180 top
R222  10K  [0603-RES]  190.5,11.18 180 top
R223  10K  [0603-RES]  194.82,21.46 0 top
R224  330  [0603-RES]  190.37,18.92 180 top
R225  10K  [0603-RES]  185.93,21.46 180 top
R226  330  [0603-RES]  239.78,8.76 0 top
R227  10K  [0603-RES]  239.78,17.02 180 top
R228  10K  [0603-RES]  239.78,11.18 0 top
R229  10K  [0603-RES]  239.78,18.92 0 top
R230  10K  [0603-RES]  235.33,17.02 180 top
R231  10K  [0603-RES]  235.46,11.18 180 top
R232  10K  [0603-RES]  239.78,21.46 0 top
R233  330  [0603-RES]  235.33,18.92 180 top
R234  10K  [0603-RES]  230.89,21.46 180 top
R235  330  [0603-RES]  284.73,8.76 0 top
R236  10K  [0603-RES]  284.73,17.02 180 top
R237  10K  [0603-RES]  284.73,11.18 0 top
R238  10K  [0603-RES]  284.73,18.92 0 top
R239  10K  [0603-RES]  280.29,17.02 180 top
R240  10K  [0603-RES]  280.42,11.18 180 top
R241  10K  [0603-RES]  284.73,21.46 0 top
R242  330  [0603-RES]  280.29,18.92 180 top
R243  10K  [0603-RES]  275.84,21.46 180 top
R244  330  [0603-RES]  194.82,25.78 0 top
R245  10K  [0603-RES]  194.82,34.04 180 top
R246  10K  [0603-RES]  194.82,28.19 0 top
R247  10K  [0603-RES]  194.82,35.94 0 top
R248  10K  [0603-RES]  190.37,34.04 180 top
R249  10K  [0603-RES]  190.5,28.19 180 top
R250  10K  [0603-RES]  194.82,38.48 0 top
R251  330  [0603-RES]  190.37,35.94 180 top
R252  10K  [0603-RES]  185.93,38.48 180 top
R253  330  [0603-RES]  239.78,25.78 0 top
R254  10K  [0603-RES]  239.78,34.04 180 top
R255  10K  [0603-RES]  239.78,28.19 0 top
R256  10K  [0603-RES]  239.78,35.94 0 top
R257  10K  [0603-RES]  235.33,34.04 180 top
R258  10K  [0603-RES]  235.46,28.19 180 top
R259  10K  [0603-RES]  239.78,38.48 0 top
R260  330  [0603-RES]  235.33,35.94 180 top
R261  10K  [0603-RES]  230.89,38.48 180 top
R262  330  [0603-RES]  284.73,25.78 0 top
R263  10K  [0603-RES]  284.73,34.04 180 top
R264  10K  [0603-RES]  284.73,28.19 0 top
R265  10K  [0603-RES]  284.73,35.94 0 top
R266  10K  [0603-RES]  280.29,34.04 180 top
R267  10K  [0603-RES]  280.42,28.19 180 top
R268  10K  [0603-RES]  284.73,38.48 0 top
R269  330  [0603-RES]  280.29,35.94 180 top
R270  10K  [0603-RES]  275.84,38.48 180 top
R271  330  [0603-RES]  194.82,42.8 0 top
R272  10K  [0603-RES]  194.82,51.05 180 top
R273  10K  [0603-RES]  194.82,45.21 0 top
R274  10K  [0603-RES]  194.82,52.96 0 top
R275  10K  [0603-RES]  190.37,51.05 180 top
R276  10K  [0603-RES]  190.5,45.21 180 top
R277  10K  [0603-RES]  194.82,55.5 0 top
R278  330  [0603-RES]  190.37,52.96 180 top
R279  10K  [0603-RES]  185.93,55.5 180 top
R280  330  [0603-RES]  239.78,42.8 0 top
R281  10K  [0603-RES]  239.78,51.05 180 top
R282  10K  [0603-RES]  239.78,45.21 0 top
R283  10K  [0603-RES]  239.78,52.96 0 top
R284  10K  [0603-RES]  235.33,51.05 180 top
R285  10K  [0603-RES]  235.46,45.21 180 top
R286  10K  [0603-RES]  239.78,55.5 0 top
R287  330  [0603-RES]  235.33,52.96 180 top
R288  10K  [0603-RES]  230.89,55.5 180 top
R289  330  [0603-RES]  284.73,42.8 0 top
R290  10K  [0603-RES]  284.73,51.05 180 top
R291  10K  [0603-RES]  284.73,45.21 0 top
R292  10K  [0603-RES]  284.73,52.96 0 top
R293  10K  [0603-RES]  280.29,51.05 180 top
R294  10K  [0603-RES]  280.42,45.21 180 top
R295  10K  [0603-RES]  284.73,55.5 0 top
R296  330  [0603-RES]  280.29,52.96 180 top
R297  10K  [0603-RES]  275.84,55.5 180 top
R298  330  [0603-RES]  194.82,59.82 0 top
R299  10K  [0603-RES]  194.82,68.07 180 top
R300  10K  [0603-RES]  194.82,62.23 0 top
R301  10K  [0603-RES]  194.82,69.98 0 top
R302  10K  [0603-RES]  190.37,68.07 180 top
R303  10K  [0603-RES]  190.5,62.23 180 top
R304  10K  [0603-RES]  194.82,72.52 0 top
R305  330  [0603-RES]  190.37,69.98 180 top
R306  10K  [0603-RES]  185.93,72.52 180 top
R307  330  [0603-RES]  239.78,59.82 0 top
R308  10K  [0603-RES]  239.78,68.07 180 top
R309  10K  [0603-RES]  239.78,62.23 0 top
R310  10K  [0603-RES]  239.78,69.98 0 top
R311  10K  [0603-RES]  235.33,68.07 180 top
R312  10K  [0603-RES]  235.46,62.23 180 top
R313  10K  [0603-RES]  239.78,72.52 0 top
R314  330  [0603-RES]  235.33,69.98 180 top
R315  10K  [0603-RES]  230.89,72.52 180 top
R316  330  [0603-RES]  284.73,59.82 0 top
R317  10K  [0603-RES]  284.73,68.07 180 top
R318  10K  [0603-RES]  284.73,62.23 0 top
R319  10K  [0603-RES]  284.73,69.98 0 top
R320  10K  [0603-RES]  280.29,68.07 180 top
R321  10K  [0603-RES]  280.42,62.23 180 top
R322  10K  [0603-RES]  284.73,72.52 0 top
R323  330  [0603-RES]  280.29,69.98 180 top
R324  10K  [0603-RES]  275.84,72.52 180 top
R325  330  [0603-RES]  194.82,90.55 0 top
R326  10K  [0603-RES]  194.82,98.81 180 top
R327  10K  [0603-RES]  194.82,92.96 0 top
R328  10K  [0603-RES]  194.82,100.71 0 top
R329  10K  [0603-RES]  190.37,98.81 180 top
R330  10K  [0603-RES]  190.5,92.96 180 top
R331  10K  [0603-RES]  194.82,103.25 0 top
R332  330  [0603-RES]  190.37,100.71 180 top
R333  10K  [0603-RES]  185.93,103.25 180 top
R334  330  [0603-RES]  239.78,90.55 0 top
R335  10K  [0603-RES]  239.78,98.81 180 top
R336  10K  [0603-RES]  239.78,92.96 0 top
R337  10K  [0603-RES]  239.78,100.71 0 top
R338  10K  [0603-RES]  235.33,98.81 180 top
R339  10K  [0603-RES]  235.46,92.96 180 top
R340  10K  [0603-RES]  239.78,103.25 0 top
R341  330  [0603-RES]  235.33,100.71 180 top
R342  10K  [0603-RES]  230.89,103.25 180 top
R343  330  [0603-RES]  284.73,90.55 0 top
R344  10K  [0603-RES]  284.73,98.81 180 top
R345  10K  [0603-RES]  284.73,92.96 0 top
R346  10K  [0603-RES]  284.73,100.71 0 top
R347  10K  [0603-RES]  280.29,98.81 180 top
R348  10K  [0603-RES]  280.42,92.96 180 top
R349  10K  [0603-RES]  284.73,103.25 0 top
R350  330  [0603-RES]  280.29,100.71 180 top
R351  10K  [0603-RES]  275.84,103.25 180 top
R352  330  [0603-RES]  194.82,107.57 0 top
R353  10K  [0603-RES]  194.82,115.82 180 top
R354  10K  [0603-RES]  194.82,109.98 0 top
R355  10K  [0603-RES]  194.82,117.73 0 top
R356  10K  [0603-RES]  190.37,115.82 180 top
R357  10K  [0603-RES]  190.5,109.98 180 top
R358  10K  [0603-RES]  194.82,120.27 0 top
R359  330  [0603-RES]  190.37,117.73 180 top
R360  10K  [0603-RES]  185.93,120.27 180 top
R361  330  [0603-RES]  239.78,107.57 0 top
R362  10K  [0603-RES]  239.78,115.82 180 top
R363  10K  [0603-RES]  239.78,109.98 0 top
R364  10K  [0603-RES]  239.78,117.73 0 top
R365  10K  [0603-RES]  235.33,115.82 180 top
R366  10K  [0603-RES]  235.46,109.98 180 top
R367  10K  [0603-RES]  239.78,120.27 0 top
R368  330  [0603-RES]  235.33,117.73 180 top
R369  10K  [0603-RES]  230.89,120.27 180 top
R370  330  [0603-RES]  284.73,107.57 0 top
R371  10K  [0603-RES]  284.73,115.82 180 top
R372  10K  [0603-RES]  284.73,109.98 0 top
R373  10K  [0603-RES]  284.73,117.73 0 top
R374  10K  [0603-RES]  280.29,115.82 180 top
R375  10K  [0603-RES]  280.42,109.98 180 top
R376  10K  [0603-RES]  284.73,120.27 0 top
R377  330  [0603-RES]  280.29,117.73 180 top
R378  10K  [0603-RES]  275.84,120.27 180 top
R379  330  [0603-RES]  194.82,124.59 0 top
R380  10K  [0603-RES]  194.82,132.84 180 top
R381  10K  [0603-RES]  194.82,127 0 top
R382  10K  [0603-RES]  194.82,134.75 0 top
R383  10K  [0603-RES]  190.37,132.84 180 top
R384  10K  [0603-RES]  190.5,127 180 top
R385  10K  [0603-RES]  194.82,137.29 0 top
R386  330  [0603-RES]  190.37,134.75 180 top
R387  10K  [0603-RES]  185.93,137.29 180 top
R388  330  [0603-RES]  239.78,124.59 0 top
R389  10K  [0603-RES]  239.78,132.84 180 top
R390  10K  [0603-RES]  239.78,127 0 top
R391  10K  [0603-RES]  239.78,134.75 0 top
R392  10K  [0603-RES]  235.33,132.84 180 top
R393  10K  [0603-RES]  235.46,127 180 top
R394  10K  [0603-RES]  239.78,137.29 0 top
R395  330  [0603-RES]  235.33,134.75 180 top
R396  10K  [0603-RES]  230.89,137.29 180 top
R397  330  [0603-RES]  284.73,124.59 0 top
R398  10K  [0603-RES]  284.73,132.84 180 top
R399  10K  [0603-RES]  284.73,127 0 top
R400  10K  [0603-RES]  284.73,134.75 0 top
R401  10K  [0603-RES]  280.29,132.84 180 top
R402  10K  [0603-RES]  280.42,127 180 top
R403  10K  [0603-RES]  284.73,137.29 0 top
R404  330  [0603-RES]  280.29,134.75 180 top
R405  10K  [0603-RES]  275.84,137.29 180 top
R406  330  [0603-RES]  194.82,141.61 0 top
R407  10K  [0603-RES]  194.82,149.86 180 top
R408  10K  [0603-RES]  194.82,144.02 0 top
R409  10K  [0603-RES]  194.82,151.77 0 top
R410  10K  [0603-RES]  190.37,149.86 180 top
R411  10K  [0603-RES]  190.5,144.02 180 top
R412  10K  [0603-RES]  194.82,154.31 0 top
R413  330  [0603-RES]  190.37,151.77 180 top
R414  10K  [0603-RES]  185.93,154.31 180 top
R415  330  [0603-RES]  239.78,141.61 0 top
R416  10K  [0603-RES]  239.78,149.86 180 top
R417  10K  [0603-RES]  239.78,144.02 0 top
R418  10K  [0603-RES]  239.78,151.77 0 top
R419  10K  [0603-RES]  235.33,149.86 180 top
R420  10K  [0603-RES]  235.46,144.02 180 top
R421  10K  [0603-RES]  239.78,154.31 0 top
R422  330  [0603-RES]  235.33,151.77 180 top
R423  10K  [0603-RES]  230.89,154.31 180 top
R424  330  [0603-RES]  284.73,141.61 0 top
R425  10K  [0603-RES]  284.73,149.86 180 top
R426  10K  [0603-RES]  284.73,144.02 0 top
R427  10K  [0603-RES]  284.73,151.77 0 top
R428  10K  [0603-RES]  280.29,149.86 180 top
R429  10K  [0603-RES]  280.42,144.02 180 top
R430  10K  [0603-RES]  284.73,154.31 0 top
R431  330  [0603-RES]  280.29,151.77 180 top
R432  10K  [0603-RES]  275.84,154.31 180 top
SJ1  SOLDERJUMPERNO  [SJ_2S-NO]  24.64,18.29 90 bottom
SJ2  SOLDERJUMPERNO  [SJ_2S-NO]  69.6,18.29 90 bottom
SJ3  SOLDERJUMPERNO  [SJ_2S-NO]  114.55,18.29 90 bottom
SJ4  SOLDERJUMPERNO  [SJ_2S-NO]  24.64,35.31 90 bottom
SJ5  SOLDERJUMPERNO  [SJ_2S-NO]  69.6,35.31 90 bottom
SJ6  SOLDERJUMPERNO  [SJ_2S-NO]  114.55,35.31 90 bottom
SJ7  SOLDERJUMPERNO  [SJ_2S-NO]  24.64,52.32 90 bottom
SJ8  SOLDERJUMPERNO  [SJ_2S-NO]  69.6,52.32 90 bottom
SJ9  SOLDERJUMPERNO  [SJ_2S-NO]  114.55,52.32 90 bottom
SJ10  SOLDERJUMPERNO  [SJ_2S-NO]  24.64,69.34 90 bottom
SJ11  SOLDERJUMPERNO  [SJ_2S-NO]  69.6,69.34 90 bottom
SJ12  SOLDERJUMPERNO  [SJ_2S-NO]  114.55,69.34 90 bottom
SJ13  SOLDERJUMPERNO  [SJ_2S-NO]  24.64,100.08 90 bottom
SJ14  SOLDERJUMPERNO  [SJ_2S-NO]  69.6,100.08 90 bottom
SJ15  SOLDERJUMPERNO  [SJ_2S-NO]  114.55,100.08 90 bottom